# Altium PCB PCB1.PcbDoc
Units mil, origin at the board's own origin, x right, y up, seen from the top; angles counter-clockwise.
Board outline 3000 x 3000 mil, 2 copper layers (Top Layer, Bottom Layer); 48 components, 19 nets, 128 pads, 181 vias.
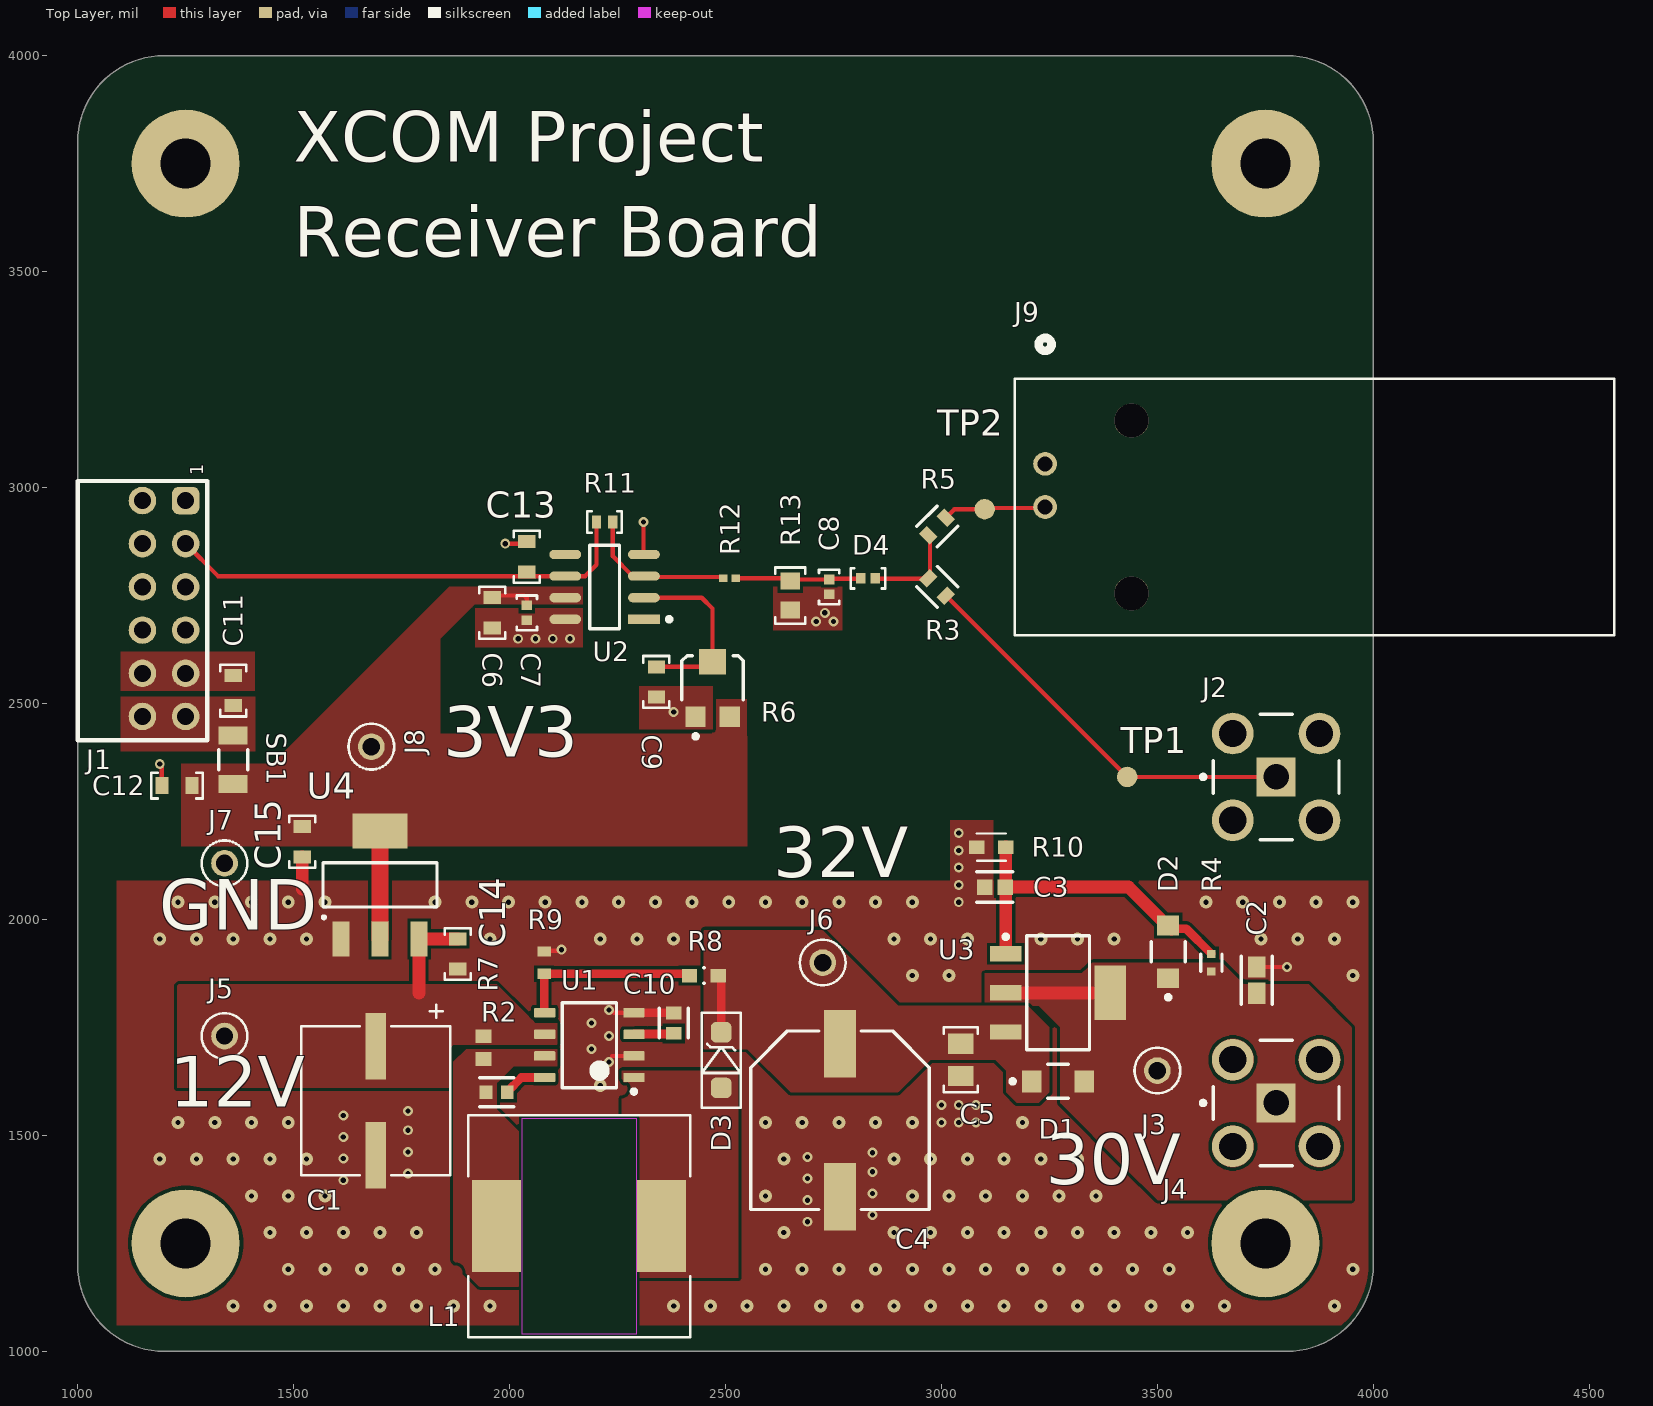
[diagram p0: Top Layer view]
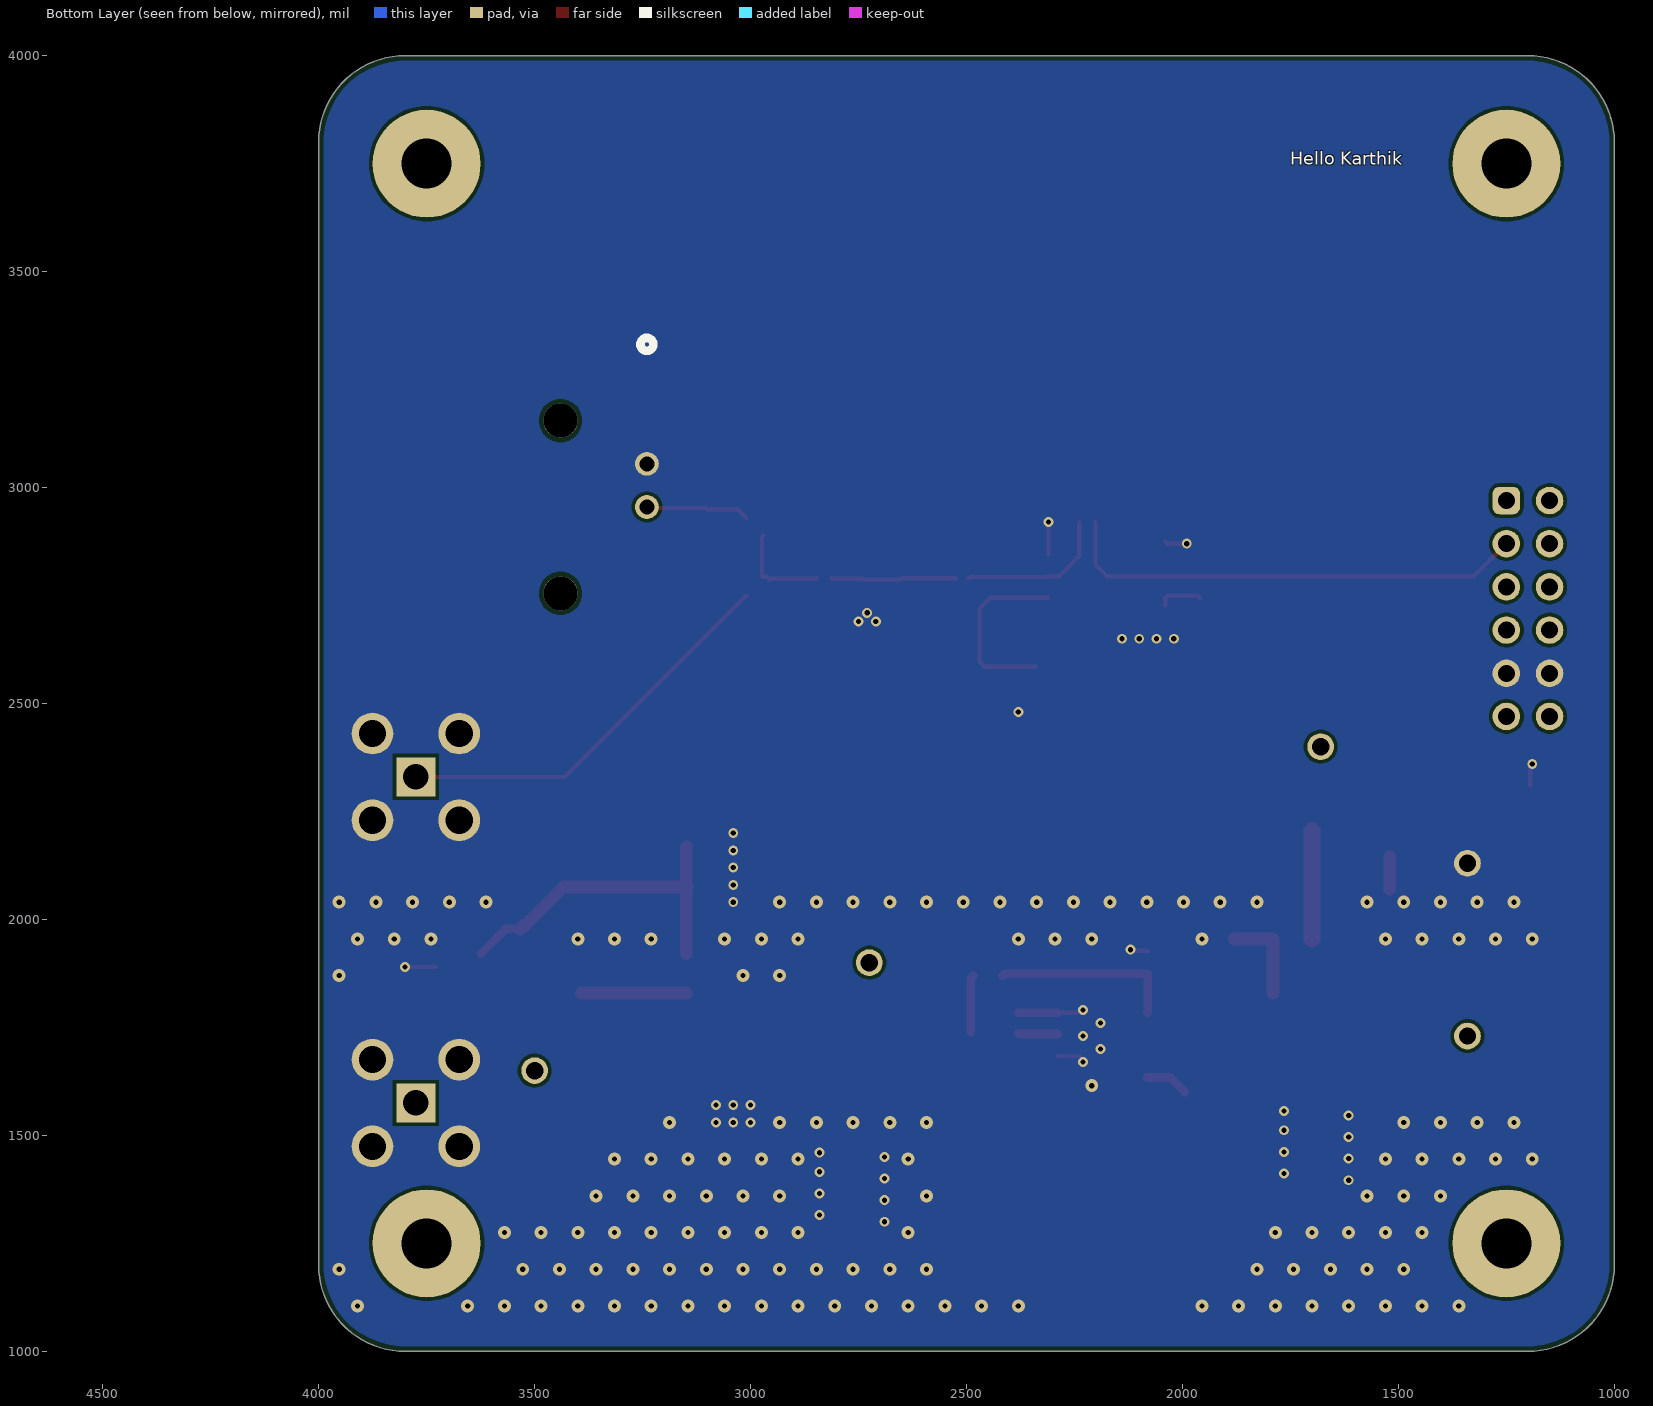
[diagram p1: Bottom Layer view, seen from below]
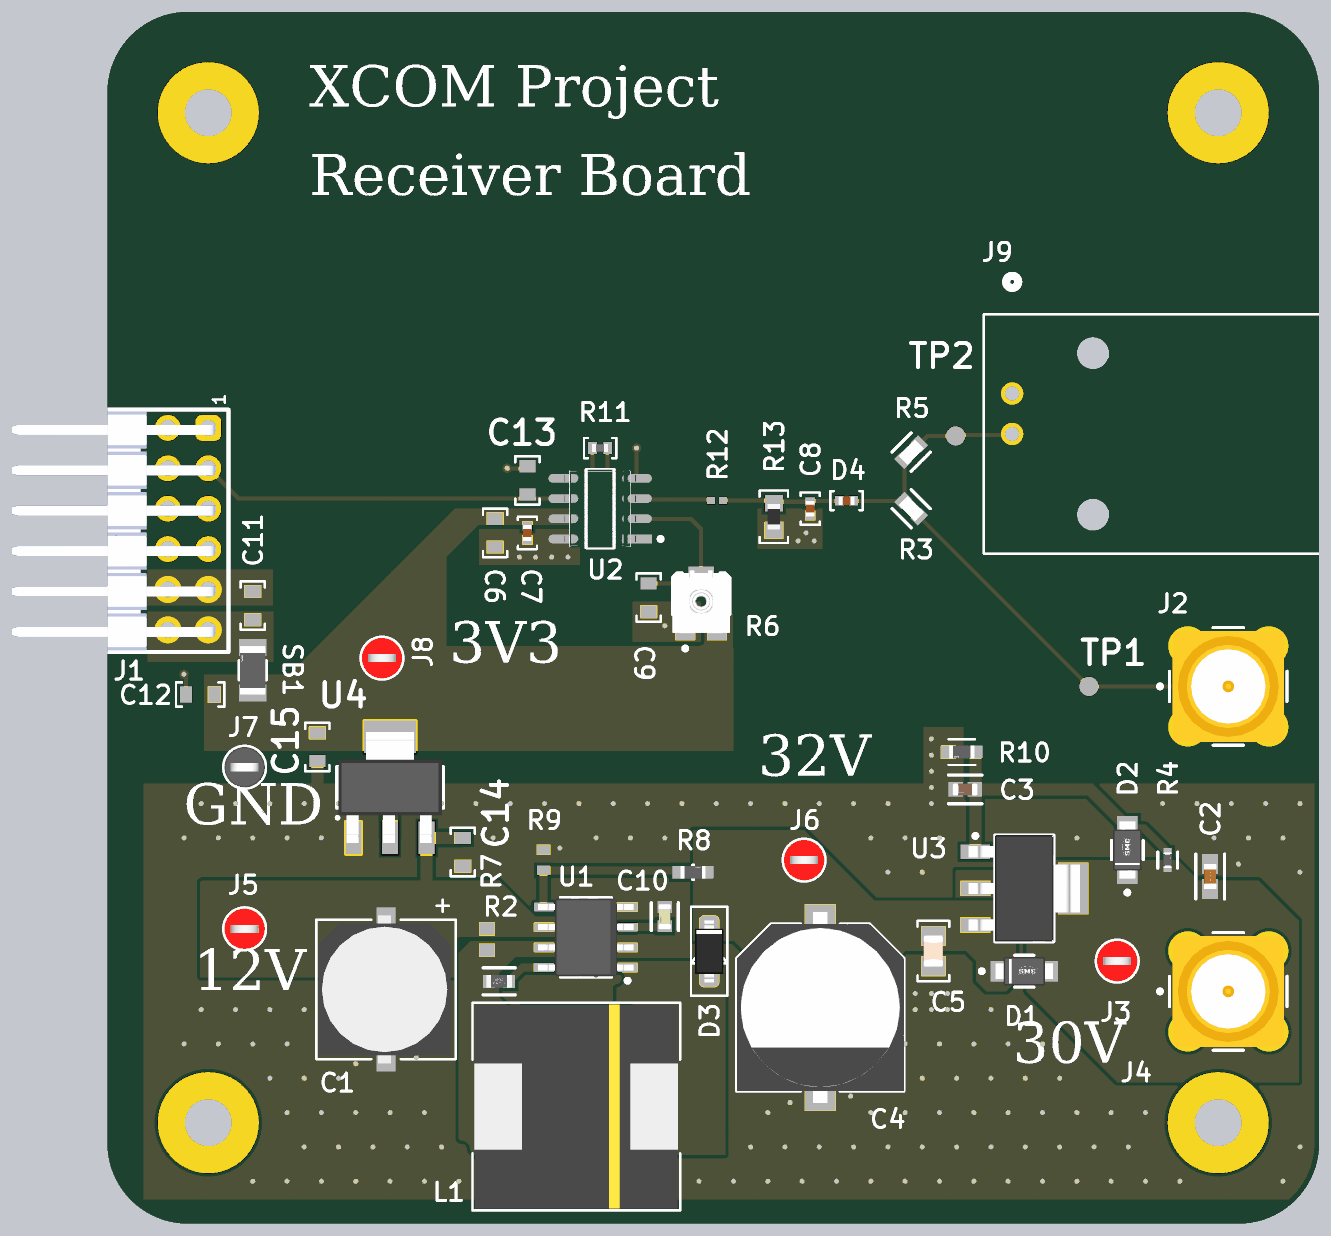
[diagram p2: 3D render of the assembled board from above, using the file's embedded part models]

## Layer stack, top to bottom
Top Solder: solder mask 0.4, Solder Resist, Dk 3.5
Top Layer: signal copper 1.4
Dielectric 1: dielectric 12.6, FR-4, Dk 4.8
Bottom Layer: signal copper 1.4
Bottom Solder: solder mask 0.4, Solder Resist, Dk 3.5

## Board outline
1000,1200 ccw(c1200,1200) 1200,1000 3800,1000 ccw(c3800,1200) 4000,1200 4000,3800 ccw(c3800,3800) 3800,4000 1200,4000 ccw(c1200,3800) 1000,3800 1000,2700

## Design rules (kind name [scope] priority, off if disabled: settings)
AcuteAngle [All] p1: minimum=8.00000000000000E+0001 checktracksonly=FALSE
BoardOutlineClearance "BoardOutlineClearance JLCPCB" [All] p1: gap=11.81 ignorepadtopadclearanceinfootprint=FALSE
Clearance "Clearance JLCPCB 4 layer" [All] p1: gap=7.87 ignorepadtopadclearanceinfootprint=FALSE except(3.54: Arc-Arc Arc-Track Track-Track; 5: Arc-SMDPad Arc-Via Track-SMDPad Track-Via SMDPad-SMDPad; 9.45: THPad-THPad THPad-Via Via-Via; 10: Arc-Hole Track-Hole SMDPad-Hole THPad-Hole Via-Hole Fill-Hole Poly-Hole Region-Hole Text-Hole)
DiffPairsRouting "Diff Pairs USB 2.0" [InDifferentialPairClass('USB 2.0')] p1: maxlimit=5 minlimit=5 mostfreqgap=5 toplayer_minwidth=7.87 toplayer_maxwidth=7.87 toplayer_prefwidth=7.87 bottomlayer_minwidth=7.87 bottomlayer_maxwidth=7.87 bottomlayer_prefwidth=7.87 impedanceprofiledriven=TRUE impedanceprofileid={9C1C01C3-81FD-4AE1-9E3D-BC841176F5CA} maxuncoupledlength=500
DiffPairsRouting "Diff Pairs PCIe Gen 2" [InDifferentialPairClass('PCIe Gen 2')] p2: maxlimit=5 minlimit=5 mostfreqgap=5 toplayer_minwidth=5.53 toplayer_maxwidth=5.53 toplayer_prefwidth=5.53 bottomlayer_minwidth=5.53 bottomlayer_maxwidth=5.53 bottomlayer_prefwidth=5.53 impedanceprofiledriven=TRUE impedanceprofileid={D86E5A41-F98B-413D-93FD-A6E48D035561} maxuncoupledlength=500
HoleSize "HoleSize JLCPCB Pad" [IsPad] p1: absolutevalues=TRUE maxlimit=248.03 minlimit=19.68 maxpercent=80.000 minpercent=20.000
HoleSize "HoleSize JLCPCB 4 layer Cheap" [All] p2: absolutevalues=TRUE maxlimit=248.03 minlimit=11.81 maxpercent=80.000 minpercent=20.000
HoleToHoleClearance "HoleToHoleClearance JLCPCB Same Net" [All] p1: gap=10 allowstackedmicrovias=TRUE
MinimumAnnularRing "MinimumAnnularRing JLCPCB Via" [All] p1: minimumring=2.95
MinimumAnnularRing "MinimumAnnularRing JLCPCB Pad" [IsPad] p2: minimumring=9.84
MinimumAnnularRing "MinimumAnnularRing JLCPCB 1oz" [All] p3: minimumring=5.12
MinimumSolderMaskSliver "MinimumSolderMaskSliver JLCPCB" [All] p1: minsoldermaskwidth=3.94
PlaneClearance [All] p1: clearance=11.81
PlaneConnect [All] p1: planeconnectstyle=Direct reliefexpansion=20 reliefentries=4 reliefconductorwidth=10 reliefairgap=10
PolygonConnect [All] p1: connectstyle=Direct reliefconductorwidth=15 reliefentries=4 polygonreliefangle="45 Angle" airgapwidth=10
RoutingVias "RoutingVias JLCPCB 4 layer" [All] p1: holewidth=19.68 width=39.37 viastyle="Through Hole" minholewidth=11.81 minwidth=17.72 maxholewidth=50 maxwidth=80 useviatemplates=TRUE viatemplateguid#1={1FF1CE2E-D4DA-45DD-BA18-462DD51CCE8B} viatemplateguid#2={A26B80D9-3972-439C-BF20-AF114F6C39ED} viatemplateguid#3={94EF3918-7136-44E3-8D4D-2DFBB820EAE1} viatemplatename#1=v50h30m0mx0(Tol13-8) viatemplatename#2=v65h40m0mx0(Tol13-8) viatemplatename#3=v80h50m0mx0(Tol13-8)
SilkToSilkClearance [All] p1: silktosilkclearance=3
SilkToSolderMaskClearance "SilkToSolderMaskClearance JLCPCB" [IsPad] p1: minsilkscreentomaskgap=5.91 clearancetoexposedcopper=TRUE
SolderMaskExpansion "SolderMaskExpansion JLCPCB" [All] p1: expansion=1.5 istentingtop=FALSE
SupplyNets "Schematic Supply Nets_2" [InNet('12V')] p1: voltage=0.000
SupplyNets "Schematic Supply Nets_1" [InNet('3V3')] p2: voltage=0.000
SupplyNets "Schematic Supply Nets" [InNet('GND')] p3: voltage=0.000
UnRoutedNet [All] p1: checkbadconnections=TRUE
Width "Width JLCPCB 4 layer" [All] p1: maxlimit=196.85 minlimit=3.54 preferedwidth=9.84 minimp=50.000000 maximp=50.000000 favimp=50.000000
21 further rules are at their usual default settings.

## Components (designator, comment, footprint, x,y, rotation, side; value= is the part's Value field where it differs from the comment)
C1 "100uF electrolytic 35 V" PCAP_8x5.4-ELECT_NCA 1690,1580 r270 top value=100uF
C2 "UMK107BJ105KA-T" FP-0603-L_1_6_0_1-W_0_8_0-IPC_A 3730,1859.4 r270 top
C3 "GRM188R6YA106MA73D" FP-GRM188-0_2-IPC_C 3123.64,2075 r180 top
C4 "EEE-FK1V331P" PNSC-EEE-FK1V331P_L 2765,1535 r270 top
C5 "100nF Ceramic 50V" CAPACITOR_0805 3045,1675 r270 top value=0.1uF
C6 "100nF Ceramic 25V" CAPACITOR_0603 1960,2710 r270 top value=0.1uF
C7 "2.2uF Ceramic 35V" CAPACITOR_0402 2040,2710 r270 top value=2.2uF
C8 "15pF Ceramic 50V" CAPACITOR_0402 2740,2770 r270 top value=15pF
C9 "100nF Ceramic 25V" CAPACITOR_0603 2340,2550 r270 top value=0.1uF
C10 "C0603C152F1GACTU" FP-C0603C-CF-MFG 2380,1760 r90 top value="1,500 pF"
C11 "10uF Ceramic 6.3V" CAPACITOR_0603 1360,2530 r90 top
C12 "10uF Ceramic 6.3V" CAPACITOR_0603 1230,2310 r180 top
C13 "18pF Ceramic 50V" CAPACITOR_0603 2040,2840 r90 top value=18pF
C14 "10uF Ceramic 6.3V" CAPACITOR_0603 1880,1920 r270 top
C15 "10uF Ceramic 6.3V" CAPACITOR_0603 1520,2180 r270 top
D1 "1N4007FL" FP-1N4007FL-MFG 3270,1625 r0 top
D2 "1N4007FL" FP-1N4007FL-MFG 3525,1925 r90 top
D3 "STPS140Z" SOD-123 2490,1674.37 r90 top
D4 "BAR9002ELE6327XTMA1" DIODE_0402 2830,2790 r180 top
J1 "PH2RA-12-UA" PH2RA-12-UA-Footprint-1 1250,2970 r90 top
J2 "RF2-04A-T-00-50-G" FP-RF2-04A-T-00-50-G-MFG 3775,2330 r0 top
J3 "5000" FP-5000-MFG 3500,1650 r0 top
J4 "RF2-04A-T-00-50-G" FP-RF2-04A-T-00-50-G-MFG 3775,1575 r0 top
J5 "5000" FP-5000-MFG 1340,1730 r0 top
J6 "5000" FP-5000-MFG 2725,1900 r0 top
J7 "5001" FP-5001-MFG 1340,2130 r0 top
J8 "5000" FP-5000-MFG 1680,2400 r0 top
J9 "031-5431-10RFX" 031-5431-10RFX-Footprint-1 3240,3055 r270 top
L1 "SRR1280-181K" SRR1280 2161,1290 r180 top value="180 uH"
R2 "CRGCQ0603F180R" FP-CRGCQ0603-IPC_C 1970,1600 r0 top value=180Ω
R3 "RMCF0603ZT0R00" FP-RMCF0603-MFG 2990,2770 r315 top value=0mΩ
R4 "ERA-2AEB113X" FP-ERA2A-MFG 3625,1900 r270 top
R5 "RMCF0603ZT0R00" FP-RMCF0603-MFG 2990,2910 r225 top value=0mΩ
R6 "TC33X-2-103E" BOUR-TC33X-2_V 2470,2540 r90 top
R7 "ERJ-3RQFR22V" RESC1608X55X30NL15T15 1940,1703.43 r270 top value=.22
R8 "RC0603FR-0747KL" FP-RC0603FR-0747KL-MFG 2450,1870 r0 top
R9 "RC0603FR-072K2L" RESC1608X55X25LL10T15 2080,1900 r270 top
R10 "RT0603BRC07500RL" RESC16080X45_RT0603-0_55_MFG 3115.47,2167.44 r180 top
R11 "10k Ohm 1% 1/16W" RESISTOR_0402 2220,2920 r0 top
R12 "RC0402FR-0749R9L" RESC1005X40X25LL05T10 2509.53,2790 r180 top value=49.9
R13 "1k Ohm 5% 1/8W" RESISTOR_0603 2650,2750 r270 top
SB1 "JUMPER_0_1206" RESISTOR_1206 1360,2370 r90 top value=0
TP1 "PCB Test Point" TESTPOINT_1.2MM#1 3430,2330 r90 top
TP2 "PCB Test Point" TESTPOINT_1.2MM#2 3130,3050 r90 top
U1 "MC33063AQDRQ1" D0008A_L 2184.65,1709 r180 top
U2 "TLV3501AID" FP-D0008A-IPC_C 2220,2770 r180 top
U3 "LM317MSTT3G" SOT223-3 3270,1830 r0 top
U4 "LM1117IMPX-3.3/NOPB" SOT-223-4 1700,2080 r90 top

## Footprints (in the part's own frame and the unit in brackets; to place one, negate y for a bottom-side part, rotate by r counter-clockwise, add the part's x,y. Pads: shape width x height; smd on the part's side, far side on the other; paste and mask are expansions set on the pad)
031-5431-10RFX-Footprint-1 [mil]
  round 55 / inner round 60 / far side round 55 hole 35 paste-99999 mask+0: 1(0,0) 2(100,0)
  round 79 / inner round 60 / far side round 79 hole 79 unplated paste-99999 mask+0: 3(-100,200) 4(300,200)
  silkscreen extent -291,-70 396,1318
BOUR-TC33X-2_V [mm] "SMD, 3-Leads, Body 3.8x3.6mm"
  rect 1.2x1.2 smd: 1(-1.8,1) 3(-1.8,-1)
  rect 1.5x1.6 smd: 2(1.45,0)
  silkscreen extent -3.07,-1.8 1.8,1.8, body extent -2,-1.8 1.96,1.8, height 1.15
CAPACITOR_0402 [mm]
  rect 0.56x0.6 smd: 1(-0.435,0) 2(0.435,0)
  silkscreen extent -1.02,-0.6 1.02,0.6, body extent -0.5,-0.28 0.5,0.27, height 0.51
CAPACITOR_0603 [mil] "CAPACITOR 0603"
  rect 30x40 smd: 1(-35,0) 2(35,0)
  silkscreen extent -60,-30 60,30, body extent -31,-16 32,16, height 31
CAPACITOR_0805 [mm] "CAPACITOR 0805"
  rect 1.2x1.5 smd: 1(-0.95,0) 2(0.95,0)
  silkscreen extent -1.91,-1 1.9,1, body extent -1,-0.62 1,0.63, height 1.26
D0008A_L [mm] "SOIC, 8-Leads, Body 5x4mm, Pitch 1.27mm, IPC High Density"
  rrect18% 1.25x0.55 smd: 1(-2.625,1.905) 2(-2.625,0.635) 3(-2.625,-0.635) 4(-2.625,-1.905) 5(2.625,-1.905) 6(2.625,-0.635) 7(2.625,0.635) 8(2.625,1.905)
  silkscreen extent -2.75,-2.5 1.6,2.85, body extent -3,-2.45 3,2.45, height 1.63
DIODE_0402 [mm]
  rect 0.56x0.6 smd: 1(-0.435,0) 2(0.435,0)
  silkscreen extent -1.02,-0.6 1.02,0.6, body extent -0.5,-0.28 0.5,0.27, height 0.51
FP-1N4007FL-MFG [mm]
  rect 1.15x1.3 smd paste+0 mask+0: 1(-1.55,0) 2(1.55,0)
  silkscreen extent -2.8,-1 0.6,1, body extent -2.22,-1.1 2.22,1.1, height 0.25
FP-0603-L_1_6_0_1-W_0_8_0-IPC_A [mil]
  rect 49.52x39.85 smd paste+0 mask+0: 1(-30.6,0) 2(30.6,0)
  silkscreen extent -55,-36 55,36, body extent -75,-40 75,40, height 10
FP-5000-MFG [mm]
  round 1.57 hole 1.02 paste-2539.97 mask+0: 1(0,0)
  silkscreen extent -1.35,-1.34 1.35,1.34, body extent -1.45,-1.45 1.45,1.45, height 0.25
FP-5001-MFG [mm]
  round 1.57 hole 1.016 paste-2539.97 mask+0: 1(0,0)
  silkscreen extent -1.35,-1.34 1.35,1.34, body extent -1.45,-1.45 1.45,1.45, height 0.25
FP-C0603C-CF-MFG [mm]
  rect 0.75x0.9 smd paste+0 mask+0: 1(-0.6,0) 2(0.6,0)
  silkscreen extent -0.87,-0.85 0.88,0.85, body extent -1.2,-0.6 1.2,0.6, height 0.25
FP-CRGCQ0603-IPC_C [mil]
  rect 29.85x31.97 smd paste+0 mask+0: 1(-24.68,0) 2(24.68,0)
  silkscreen extent -40,-33 40,33, body extent -44,-22 44,22, height 10
FP-D0008A-IPC_C [mil]
  rect 73.59x21.34 smd paste+0 mask+0: 1(-91.09,75)
  rrect100% 73.59x21.34 smd paste+0 mask+0: 2(-91.09,25) 3(-91.09,-25) 4(-91.09,-75) 5(91.09,-75) 6(91.09,-25) 7(91.09,25) 8(91.09,75)
  silkscreen extent -154,-97 35,97, body extent -132,-100 132,100, height 10
FP-ERA2A-MFG [mm]
  rect 0.475x0.5 smd paste+0 mask+0: 1(-0.512,0) 2(0.512,0)
  silkscreen extent -0.5,-0.63 0.5,0.63, body extent -0.85,-0.4 0.85,0.4, height 0.25
FP-GRM188-0_2-IPC_C [mil]
  rect 35.63x35.68 smd paste+0 mask+0: 1(-23.64,0) 2(23.64,0)
  silkscreen extent -41,-35 41,35, body extent -45,-24 45,24, height 10
FP-RC0603FR-0747KL-MFG [mm]
  rect 0.9x0.8 smd paste+0 mask+0: 1(-0.85,0) 2(0.85,0)
  silkscreen extent -0.03,-0.45 0.03,0.45, body extent -1.4,-0.55 1.4,0.55, height 0.25
FP-RF2-04A-T-00-50-G-MFG [mm]
  rect 2.3x2.3 hole 1.5 paste-2539.97 mask+0: 1(0,0)
  round 2.45 hole 1.6 paste-2539.97 mask+0: 2(-2.55,2.55) 3(2.55,2.55) 4(-2.55,-2.55) 5(2.55,-2.55)
  silkscreen extent -4.42,-3.7 3.7,3.7, body extent -3.88,-3.88 3.88,3.88, height 0.25
FP-RMCF0603-MFG [mm]
  rect 0.65x0.9 smd paste+0 mask+0: 1(-0.725,0) 2(0.725,0)
  silkscreen extent -0.85,-0.85 0.85,0.85, body extent -1.15,-0.58 1.15,0.58, height 0.25
PCAP_8x5.4-ELECT_NCA [mil]
  rect 154x47 smd paste+0 mask+0: 1(-126,0) 2(126,0)
  silkscreen extent -222,-173 173,173, body extent -183,-167 183,160, height 219
PH2RA-12-UA-Footprint-1 [mm]
  rrect50% 1.62x1.62 hole 1: 1(0,0)
  round 1.62 hole 1: 2(0,2.54) 3(-2.54,0) 4(-2.54,2.54) 5(-5.08,0) 6(-5.08,2.54) 7(-7.62,0) 8(-7.62,2.54) 9(-10.16,0) 10(-10.16,2.54) 11(-12.7,0) 12(-12.7,2.54)
  silkscreen extent -14.1,-1.27 1.14,6.35, body extent -14.1,-0.41 1.14,12.35, height 5.04
PNSC-EEE-FK1V331P_L [mm] "CAPAE, 2-Leads, Body 10.5x10.5mm, IPC High Density"
  rect 3.95x1.9 smd: 1(-4.5,0) 2(4.5,0)
  silkscreen extent -5.25,-5.25 5.25,5.25, body extent -6,-5.25 6,5.25, height 10.5
RESC1005X40X25LL05T10 [mm] "Chip Resistor, 2-Leads, Body 1.00x0.50mm, IPC High Density"
  rect 0.5x0.45 smd: 1(-0.375,0) 2(0.375,0)
  body extent -0.53,-0.27 0.53,0.28, height 0.4
RESC1608X55X25LL10T15 [mm] "Chip Resistor, 2-Leads, Body 1.60x0.80mm, IPC High Density"
  rect 0.6x0.8 smd: 1(-0.65,0) 2(0.65,0)
  body extent -0.85,-0.45 0.85,0.45, height 0.55
RESC1608X55X30NL15T15 [mm] "Chip Resistor, 2-Leads, Body 1.60x0.80mm, IPC Medium Density"
  rect 0.8x0.95 smd: 1(-0.675,0) 2(0.675,0)
  body extent -0.87,-0.48 0.87,0.48, height 0.55
RESC16080X45_RT0603-0_55_MFG [mm]
  rect 0.9x0.8 smd: 1(-0.85,0) 2(0.85,0)
  silkscreen extent -0.85,-0.81 0.86,0.8, body extent -1.4,-0.55 1.4,0.55, height 0.25
RESISTOR_0402 [mm] "Resistor 0402"
  rect 0.55x0.75 smd: 1(-0.475,0) 2(0.475,0)
  silkscreen extent -1.02,-0.64 1.02,0.64, body extent -0.5,-0.25 0.5,0.25, height 0.25
RESISTOR_0603 [mil] "Resistor 0603"
  rect 40x45 smd: 1(-33.5,0) 2(33.5,0)
  silkscreen extent -65,-35 65,35, body extent -31,-16 32,16, height 16
RESISTOR_1206 [mil]
  rect 41.66x67.41 smd paste+0 mask+0: 1(-56.18,0) 2(56.18,0)
  silkscreen extent -24,-34 24,34, body extent -87,-44 87,44, height 10
SOD-123 [mm] "Schottky Diode SOD-123"
  rrect50% 1.2x1.22 smd: 1(-1.635,0) 2(1.635,0)
  silkscreen extent -2.79,-1.14 2.79,1.14, body extent -1.95,-0.9 1.95,0.9, height 1.18
SOT223-3 [mm] "SOT223, 4-Leads, Body 6.50x7.00mm (avg), Pitch 2.30mm, IPC Medium Density"
  rect 1.85x0.9 smd: 1(-3.075,2.3) 2(-3.075,0) 3(-3.075,-2.3)
  rect 1.85x3.2 smd: 2(3.075,0)
  silkscreen extent -3.2,-3.35 1.85,3.42, body extent -3.5,-3.35 3.5,3.35, height 1.8
SOT-223-4 [mm]
  rect 2.05x1 smd paste+0 mask+0.102: 1(-3.175,2.3) 2(-3.175,0) 3(-3.175,-2.3)
  rect 2.05x3.25 smd paste+0 mask+0.102: 4(3.175,0)
  silkscreen extent -1.96,-3.35 1.3,3.35, body extent -3.5,-3.25 3.5,3.25, height 1.68
SRR1280 [mil]
  rect 114x213 smd paste+0 mask+0: 1(-191,0) 2(191,0)
  Top Layer keep-out region: -132,-250 -132,250 132,250 132,-250
  silkscreen extent -257,-257 257,257, body extent -252,-252 252,252, height 315
TESTPOINT_1.2MM#1 [mm]
  round 1.2 smd: TP(0,0)
TESTPOINT_1.2MM#2 [mm]
  round 1.2 smd: TP(-2.54,0.762)

## Part data
C1: library part "CAP ALUM 100UF 20% 35V SMD", "100 µF 35 V Aluminum Electrolytic Capacitors Radial, Can - SMD 1000 Hrs", Manufacturer_Part_Number=UCB1V0R1MCL1GS, Mfr_Name=Nichicon, Supplier Part Number 1=667-EEE-FT1V101AP, Copyright="Copyright (C) 2022 Ultra Librarian. All rights reserved.", Made By="Tyson Nguyen", RefDes=RefDes, Supplier 1=Mouser, Type=DEV
C2: library part CMP-2000-05447-3, "None", Capacitance=1uF, Case Code (Imperial)=0603, Case Code (Metric)=1608, Dielectric=X5R, Max Operating Temperature=85°C, Min Operating Temperature=-55°C, Package Quantity=1, Tolerance=10%, Voltage Rating=50V, Case/Package=0603, Construction=Flat, Contact Plating=Nickel, Depth=0.8mm, Halogen Free="Halogen Free", Height=0.8mm, Length=1.6mm, Mount="Surface Mount", Number of Pins=2, Packaging="Tape and Reel", Radiation Hardening=No, RoHS Compliant=Yes, Series=M, Termination=SMD/SMT, Thickness=0.035inch, Voltage Rating (DC)=50V, Width=0.031inch
C3: library part CMP-06035-045466-1, "Chip Multilayer Ceramic Capacitors for General Purpose, 0603, 10uF, X5R, 15%, 20%, 35V", Capacitance=10uF, Case Code (Imperial)=0603, Case Code (Metric)=1608, Dielectric=X5R, Max Operating Temperature=85°C, Min Operating Temperature=-55°C, Tolerance=20%, Voltage Rating=35V, Case/Package=0603, Length=0.063inch, Mount="Surface Mount", Packaging="Tape and Reel", Thickness=0.039inch, Voltage Rating (DC)=35V, Width=0.031inch
C4: library part CMP-2000-06212-1, "Aluminum Electrolytic Capacitor, 330 uF, 35 V, -55 to 105 degC, 2-Pin CAPAE, RoHS, Tape and Reel", Capacitance=330µF, Case Size/Dimension=Ø10x10.2mm, Lifetime@Temperature=2000Hrs@105°C, Manufacturer=Panasonic, Operating Temp Range=-55to+105°C, Operating Temp-Max=105°C, Package Description="2-Pin Capacitor Aluminum Electrolytic, Body 10.3 x 10.3 mm, Height 10.5 mm", Rated Voltage=35V, Ripple Current=850mA, Datasheet URL=https://datasheet.ciiva.com/29313/443481-da-01-en-smd-elko-vfk-g-330-uf-35v-29313592.pdf, Datasheet Version=07/2008, Impedance=0.08O, Manufacturer URL=http://www.panasonic.com/, Mounting Technology=SurfaceMount, Package Reference=EEE-FK1V331P, Series=FK, Type=Can
C5: library part CAPACITOR_0.1uF_0805, "Cap 100nF 50V +/-10% / Ceramic 0805", Supplier Part Number 1=38AH3645, Tolerance="+/- 10%", Voltage=50V, Made By="Robert Pafford", Supplier 1=Newark
C6 C9: library part CAPACITOR_0.1uF_0603_25V, "Cap 100nF 25V +/-10% / Ceramic 0603", Supplier Part Number 1=1276-1006-1-ND, Tolerance="+/- 10%", Voltage=6.3V, ComponentLink1Description=Datsheet, ComponentLink1URL=https://www.mouser.com/datasheet/2/212/KEM_C1002_X7R_SMD-1102033.pdf, Made By="Flip B", Supplier 1=Digikey
C7: library part CAPACITOR_2.2uF_0402, "Cap 2.2uF 35V +/-10% / Ceramic 0402", Supplier Part Number 1=445-9028-1-ND, Tolerance="+/- 10%", Voltage=35V, Made By="Flip B", Supplier 1=Digi-Key
C8: library part CAPACITOR_0.000015uF_0402, "CAP CER 15PF 50V C0G/NP0 0402", Supplier Part Number 1=82AC9245, Tolerance="+/- 5%", Voltage=50V, Made By="Robert Pafford", Supplier 1=Newark
C10: library part CMP-1035-01965-2, "CAP CER 1500PF 100V NP0 0603", Capacitance="1,500 pF", Manufacturer=KEMET, Package=C0603C-CF, Temperature="-55°C to +125°C", Temperature Characteristic=C0G, Temperature Coefficient=30ppm/°C, Temperature Range High=+125°C, Temperature Range Low=-55°C, Tolerance=0.01, Voltage Rating="100 V", Automotive=Yes, Automotive Grade="Grade 1", Category=Cap, ComponentLink2Description=Datasheet, ComponentLink2URL=https://api.kemet.com/component-edge/download/datasheet/C0603C100J5GACAUTO.pdf, Device Class L1="Passive Components", Device Class L2=Capacitors, Device Class L3="Ceramic Capacitors", Digikey Description="CAP CER 1500PF 100V NP0 0603", Height=0.87mm, Lead Free=Yes, Manufacturer Part Number=C0603C152F1GACTU, Material=Ceramic, Mouser Description="Multilayer Ceramic Capacitors MLCC - SMD/SMT 100volts 1500pF 1% C0G", Octopart=https://octopart.com/c0603c152f1gactu-kemet-19049933, RoHS=TRUE
C11 C12 C14 C15: library part CAPACITOR_10uF_0603, "Cap 10uF 6.3V +/-20% / Ceramic 0603", Supplier Part Number 1=1276-1119-1-ND, Tolerance="+/- 20%", Value (uF)="10 uF", Voltage=6.3V, ComponentLink1Description=Digikey, ComponentLink1URL=https://www.digikey.com/en/products/detail/samsung-electro-mechanics/CL10A106MQ8NNNC/3886777, Made By="Flip B", Supplier 1=Digi-Key
C13: library part CAPACITOR_0.000018uF_0603, "Cap 18pF 50V +/-5% / Ceramic 0603", Supplier Part Number 1=311-1061-1-ND, Tolerance="+/- 5%", Voltage=50V, ComponentLink1Description=Datsheet, ComponentLink1URL=https://www.mouser.com/datasheet/2/212/KEM_C1002_X7R_SMD-1102033.pdf, Made By="Flip B", Supplier 1=Digi-Key
D1 D2: library part CMP-10078-122641204-1, "1N4007FL Diode Gen Purp 1KV 1A SOD123FL", Capacitance=6pF, Forward Current=1A, Max Forward Surge Current (Ifsm)=30A, Max Junction Temperature (Tj)=150°C, Max Repetitive Reverse Voltage (Vrrm)=1kV, Min Operating Temperature=-55°C, Peak Reverse Current=5µA, Height=1.1mm, Max Operating Temperature=150°C, NexarPartId=122641204, Reverse Voltage=1kV
D3: "DIODE SCHOTTKY 40V 1A SOD123", Supplier Part Number 1=497-7546-1-ND, Supplier 1=DigiKey
D4: library part "RF Diode 80V 100mA", "RF Diode PIN - Single 80V 100 mA 250 mW PG-TSLP-2-19", Forward Current=100mA, Package=0402, Voltage - Peak Reverse=80V
J1: library part CMP-002-00071-1, "Conn Unshrouded Header HDR 12 POS 2.54mm Solder RA Top Entry Thru-Hole Bag", Max Operating Temperature=105°C, Min Operating Temperature=-40°C, Pins=12
J2 J4: library part CMP-42753-000002-1, "CONN SMA JACK STR 50 OHM PCB"
J3 J5 J6 J8: library part CMP-002-00074-1, "Cable Wrap, 1/2 Inch, Polyethylene, Natural, 50 Ft, Spirap Series", Mounting Technology="PCB, Through Hole"
J7: library part CMP-002-00076-1, "Test Point, Mini, Thm, Pc, .300 L, .100 Od, Heat Resistant Nylon 46, Black", Mounting Technology="PCB, Through Hole", Pins=1
J9: library part CMP-002-00073-1, "RF BNC Connector, Female, Panel Mount, Board And Panel Mount, Solder Terminal, Jack", Max Operating Temperature=85°C, Min Operating Temperature=-55°C, Voltage Rating=500V, Connector Type=Receptacle, Gender=Male, Mounting Technology="Bulkhead, PCB, Panel, Through Hole"
L1: "FIXED IND 180UH 1.75A 300 MOHM", Supplier Part Number 1=SRR1280-181KCT-ND, R="300 mOhm", Supplier 1=DigiKey
R2: library part CMP-03211-005520-1, "CRGCQ 0603 180R 1%", Ambient Temperature Range High=+70°C, Manufacturer="TE Connectivity", Package=CRGCQ0603, Power Rating=0.1W, Resistance=180Ω, Temperature="-55°C to +155°C", Temperature Coefficient=±100ppm/°C, Temperature Range High=+155°C, Temperature Range Low=-55°C, Tolerance=0.01, Voltage Rating=75V, Category=Res, ComponentLink2Description=Datasheet, ComponentLink2URL=https://www.te.com/commerce/DocumentDelivery/DDEController?Action=showdoc&DocId=Data+Sheet%7F1773204-3%7F1%7Fpdf%7FEnglish%7FENG_DS_1773204-3_1.pdf%7F4-2176339-520, Composition="Thick Film", Device Class L1="Passive Components", Device Class L2=Resistors, Device Class L3="Chip SMD Resistors", Digikey Description="CRGCQ 0603 180R 1%", Height=0.55mm, Ipc Land Pattern Name=RESC16080X45, Lead Free=Yes, Manufacturer Part Number=CRGCQ0603F180R, Octopart=https://octopart.com/crgcq0603f180r-te+connectivity-91018047, RoHS=TRUE, Series=CRGCQ
R3 R5: library part CMP-26527-000011-1, "RES 0 OHM JUMPER 1/10W 0603", Manufacturer=Stackpole, Package=RMCF0603, Power Rating=0.1W, Resistance=0mΩ, Temperature="-55°C to +155°C", Temperature Range High=+155°C, Temperature Range Low=-55°C, Voltage Rating=75V, Automotive=Yes, Automotive Grade="Grade 0", Category=Res, ComponentLink2Description=Datasheet, ComponentLink2URL=https://www.seielect.com/catalog/sei-rmcf_rmcp.pdf, Composition="Thick Film", Device Class L1="Passive Components", Device Class L2=Resistors, Device Class L3="Chip SMD Resistors", Digikey Description="RES 0 OHM JUMPER 1/10W 0603", Height=0.55mm, Ipc Land Pattern Name=RESC15580X45, Lead Free=Yes, Manufacturer Part Number=RMCF0603ZT0R00, Octopart=https://octopart.com/rmcf0603zt0r00-stackpole+electronics-19213618, RoHS=TRUE, Series=RMCF
R4: library part CMP-2002-05776-2, Case Code (Imperial)=0402, Case Code (Metric)=1005, Max Operating Temperature=155°C, Max Power Dissipation=63mW, Min Operating Temperature=-55°C, Resistance=11kΩ, Temperature Coefficient=25ppm/°C, Tolerance=0.1%, Voltage Rating=25V, Case/Package=0402, Composition="Metal Film, Thin Film", Contact Plating=Tin, Depth=500µm, Features="Automotive AEC-Q200", Height=406.4µm, Lead Free="Lead Free", Length=1mm, Lifecycle Status=Production, Military Standard=Not, Mount="Surface Mount", NexarPartId=42798195, Number of Terminations=2, Packaging="Cut Tape", Power Rating=63mW, Radiation Hardening=No, REACH SVHC="No SVHC", RoHS=Compliant, Schedule B="8533210045, 8533210045", Voltage Rating (DC)=25V, Width=500µm
R6: library part CMP-009-00060-2, "Trimming Potentiometer, 10000 Ohm, -40 to 100 degC, 3-Pin SMD, RoHS, Tape and Reel", Case/Package=TC33X-2, Manufacturer=Bourns, Max Operating Temperature=120°C, Min Operating Temperature=-40°C, Package Description="3-Pin Surface Mount Device, Body 3.8 x 3.6 mm", Package Quantity=2500, Power=100mW, Resistance=10k, Tolerance=25%, Composition=Potentiometer, Datasheet URL=http://www.bourns.com/docs/Product-Datasheets/TC33.pdf, Datasheet Version=Aug-16, Manufacturer URL=http://www.bourns.com/, Mounting Technology=SM, Package Reference=TC33X-2, Packaging=TapeandReel, RoHS Compliant=True
R7: library part CMP-2000-00853-1, Manufacturer=Panasonic, Part Number=ERJ-3RQFR22V
R8: library part CMP-1659-00055-2, "RES SMD 47K OHM 1% 1/10W 0603", Case Code (Imperial)=0603, Case Code (Metric)=1608, Max Operating Temperature=155°C, Max Power Dissipation=100mW, Min Operating Temperature=-55°C, Package Quantity=1, Resistance=47kR, Resistance Tolerance=1%, Resistor Type="Thick Film", Temperature Coefficient=100ppm/°C, Voltage Rating=50V, Case/Package=0603, Construction=Rectangular, Depth=0.8mm, Features="Moisture Resistant", Height=0.022inch, Lead Free="Lead Free", Length=0.063inch, Military Standard=Not, Number of Pins=2, Number of Terminations=2, Packaging="Tape and Reel", Power Rating=100mW, RoHS Compliant=Yes, Series=RC, Size Code=0603, Technology="THICK FILM", Termination=SMD/SMT, Tolerance=1%, Voltage Rating (DC)=50V, Width=0.031inch
R9: library part CMP-2000-06934-1, "Thick Film Resistor, 2.2 KOhm, 100 mW, 50 V, +/- 1%, -55 to 155 degC, 2-Pin SMD (0603), RoHS, Tape and Reel", Case Code - in=0603, Case Code - mm=1608, Manufacturer=Yageo, Operating Temperature Range=-55Cto+155C, Package Description="2-Pin Surface Mount Device, Body 1.6 x 0.8 mm", Power Rating=100mW, Resistance=2.2kOhms, Temperature Coefficient=100PPM/C, Tolerance=1%, Voltage Rating=50V, Datasheet URL=http://www.yageo.com/documents/recent/PYu-RC_Group_51_RoHS_L_7.pdf, Datasheet Version="Rev. 7, 05/2017", Manufacturer URL=http://www.yageo.com/, Mounting Technology=SurfaceMount, Package Reference=0603, Packaging=Reel, Product=ThickFilmResistorsGeneralPurpose, Series=RC, Termination Style=SMD/SMT
R10: library part CMP-00621-87214386-1, "Fixed Resistor, Thin Film, 0.1W, 500ohm, 75V, 0.1% +/-Tol, 15ppm/Cel, Surface Mount, 0603", Case/Package=0603, Max Operating Temperature=155°C, Min Operating Temperature=-55°C, Power Rating=100mW, Resistance=500Ω, Temperature Coefficient=15ppm/°C, Tolerance=0.1%, Voltage Rating=75V, ComponentLink1Description="Manufacturer URL", ComponentLink1URL=http://www.yageo.com/, ComponentLink2Description="Datasheet URL", ComponentLink2URL=https://www.yageo.com/upload/media/product/productsearch/datasheet/rchip/PYu-RT_1-to-0.01_RoHS_L_15.pdf, ComponentLink3Description="Package URL", ComponentLink3URL=http://www.yageo.com/exep/pages/download/literatures/PYu-R_Mount_10.pdf, Composition="Thin Film", Height=550µm, Packaging="Tape & Reel", RoHS=Non-Compliant
R11: library part RESISTOR_10K_0402, "RES 10k OHM 1% 1/16W 0402", Digikey Part Numer=CR0603-JW-104ELFTR-ND, Supplier Part Number 1=YAG3436CT-ND, Tolerance="+/- 1%", Value  (Ohms)=10K, Made By="Robert Pafford", Supplier=Digikey, Supplier 1=Digi-Key, Wattage=1/16W
R12: library part CMP-2002-07709-1, Manufacturer="Yageo / Phycomp", Part Number=RC0402FR-0749R9L
R13: library part RESISTOR_1K_0603, "RES 1k OHM 5% 1/8W 0603", Digikey Part Numer=CR0603-JW-104ELFTR-ND, Supplier Part Number 1=2019-RK73B1JTTD102JCT-ND, Tolerance="+/- 5%", Value  (Ohms)=1K, ComponentLink1Description=Datasheet, ComponentLink1URL=https://www.bourns.com/docs/product-datasheets/CRxxxxx.pdf, Made By="Robert Pafford", Supplier=Digikey, Supplier 1=Digi-Key, Wattage=1/8W
SB1: "JUMPER 0OHM 1206"
TP1 TP2: library part TESTPOINT, Made By="Robert Pafford"
U1: library part CMP-0344-00012-2, "Inverting Buck-Boost Regulator with 3 to 40 V Input and 1.25 to 40 V Output, -40 to 125 degC, 8-Pin SOIC (D), Green (RoHS & no Sb/Br)", Manufacturer="Texas Instruments", Switch Current Limit(Typ)(A)=1.5, Switching Frequency(Max)(kHz)=100, Code_JEDEC=MS-012AA, ComponentLink1Description=Datasheet, ComponentLink1URL=http://www.ti.com/general/docs/lit/getliterature.tsp?genericPartNumber=MC33063A-Q1&fileType=pdf, ComponentLink2Description="Package Specification", ComponentLink2URL=http://www.ti.com/litv/pdf/msoi002j, DatasheetVersion=SLLS654B, Eco-Plan="Green (RoHS & no Sb/Br)", Mounting Technology="Surface Mount", PackageDescription="8-Pin Plastic Small Outline Integrated Circuit, 4.9 x 3.9 mm, Pitch 1.27 mm Pitch", PackageReference=D0008A, PackageVersion="revM, Jun-2011", PartNumber=MC33063AQDRQ1, Regulated Outputs(#)=1, SubFamily="Inverting Regulator", Topology="Inverting Buck-Boost", Vin(Max)(V)=40, Vin(Min)(V)=3, Vout(Max)(V)=40, Vout(Min)(V)=1.25
U2: library part CMP-04896-000133-1, "IC COMPARATOR 4.5NS R-R HS 8SOIC", Case/Package=SOIC, Input Bias Current=10pA, Input Offset Voltage (Vos)=6.5mV, Max Operating Temperature=125°C, Max Supply Voltage=5.5V, Min Operating Temperature=-40°C, Min Supply Voltage=2.7V, Nominal Supply Current=3.2mA, Operating Supply Current=5mA, Output Current=74mA, Package Quantity=75, Power Supply Rejection Ratio (PSRR)=100dB, Common Mode Rejection Ratio=70dB, Height=1.58mm, Hysteresis=6mV, Lead Free="Lead Free", Length=4.9mm, Mount="Surface Mount", Number of Channels=1, Number of Elements=1, Number of Pins=8, Output Type=TTL, Packaging=Rail/Tube, Propagation Delay=10ns, Quiescent Current=5mA, Radiation Hardening=No, REACH SVHC="No SVHC", Response Time=4.5ns, RoHS Compliant=Yes, Supply Type=Single, Type="General Purpose", Weight=0.002677oz, Width=3.91mm
U3: "Linear Voltage Regulator IC Positive Adjustable 1 Output 500mA SOT-223 (TO-261)", Supplier Part Number 1=LM317MSTT3GOSCT-ND, Supplier 1=DigiKey
U4: "800-mA 15-V linear voltage regulator 4-SOT-223 -40 to 125", Package="SOT-223-4 Texas Instruments", Arrow_Electronics-Purchase-URL=https://snapeda.com/shop?store=Arrow+Electronics&id=410186, Availability=Good, DigiKey-Purchase-URL=https://snapeda.com/shop?store=DigiKey&id=410186, MF="Texas Instruments", Mouser-Purchase-URL=https://snapeda.com/shop?store=Mouser&id=410186, MP=LM1117IMPX-3.3/NOPB, Price=None, SnapEDA_Link=https://www.snapeda.com/parts/LM1117IMPX-3.3/NOPB/Texas%20Instruments/view-part/410186/?ref=snap, Texas_Instruments-Purchase-URL=https://snapeda.com/shop?store=Texas+Instruments&id=410186

## Free pads (board coordinates)
  round 250 hole 116: 3(1250,1250) 3(1250,3750) 3(3750,1250) 3(3750,3750)

## Via types
v1: diameter 30, hole 12, Top Layer to Bottom Layer, tented both sides, 136 vias
v2: diameter 23, hole 12, Top Layer to Bottom Layer, tented both sides, 45 vias

## Nets (pads, with @x,y where several pads share a name; then routed paths per layer and width w, separated by ;. In a path a pad name is that pad's centre, name@x,y a point inside that pad or via, vN(x,y) a via of type N, cw(c..) or ccw(c..) an arc to the next point about the centre after c; other vN are vias at no path point)
3V3: C6.1 C7.1 C12.1 C15.1 J8.1 R6.3 SB1.1 U2.7 U4.2 U4.4 | length 351.5
  Top Layer w10: C6.1 1965,2750 2034.14,2750 2040,2744.14 C7.1
  Top Layer w40: U4.2 U4.4
12V: C1.1 C14.1 J5.1 R7.1 U1.6 U4.3 | length 214.7
  Top Layer w30: 1790,1830 1790,1954.45 U4.3 C14.1
GND: C1.2 C2.1 C3.2 C4.2 C5.2 C6.2 C7.2 C8.2 C9.2 C10.2 C11.2 C12.2 C13.2 C14.2 C15.2 J1.9 J1.10 J2.2 J2.3 J2.4 J2.5 J4.2 J4.3 J4.4 J4.5 J7.1 J9.1 R6.1 R9.1 R10.2 R13.2 U1.2 U1.4 U2.4 U2.8 U4.1 | length 555
  Top Layer w10: v2(1190,2360) 1190,2356.48 1195,2351.48 C12.2 ; v2(1990,2870) 2035,2870 C13.2 ; R9.1 2082.2,1927.8 2117.8,1927.8 v2(2120,1930) ; 2238,1683 2239,1684 U1.2 ; 2242,1784 U1.4 U1.4@2288.19,1783.81 ; v2(2310,2920) 2310,2846.09 U2.4 ; C10.2@2379.81,1783.81 C10.2 ; C2.1 v2(3800,1890)
  Top Layer w20: U1.4@2288.19,1783.81 C10.2@2379.81,1783.81
  Top Layer w30: 1520,2070 C15.2
  other v1: 1360,1105 1445,1105 1530,1105 1615,1105 1700,1105 1785,1105 1870,1105 1955,1105 2380,1105 2465,1105 2550,1105 2635,1105 2720,1105 2805,1105 2890,1105 2975,1105 3060,1105 3145,1105 3230,1105 3315,1105 3400,1105 3485,1105 3570,1105 3655,1105 3910,1105 1487.5,1190 1572.5,1190 1657.5,1190 1742.5,1190 1827.5,1190 2592.5,1190 2677.5,1190 2762.5,1190 2847.5,1190 2932.5,1190 3017.5,1190 3102.5,1190 3187.5,1190 3272.5,1190 3357.5,1190 3442.5,1190 3527.5,1190 3952.5,1190 1445,1275 1530,1275 1615,1275 1700,1275 1785,1275 2635,1275 2890,1275 2975,1275 3060,1275 3145,1275 3230,1275 3315,1275 3400,1275 3485,1275 3570,1275 1402.5,1360 1487.5,1360 1572.5,1360 2592.5,1360 2932.5,1360 3017.5,1360 3102.5,1360 3187.5,1360 3272.5,1360 3357.5,1360 1190,1445 1275,1445 1360,1445 1445,1445 1530,1445 2635,1445 2890,1445 2975,1445 3060,1445 3145,1445 3230,1445 3315,1445 1232.5,1530 1317.5,1530 1402.5,1530 1487.5,1530 2592.5,1530 2677.5,1530 2762.5,1530 2847.5,1530 2932.5,1530 3187.5,1530 2210,1615 2932.5,1870 3017.5,1870 3952.5,1870 1190,1955 1275,1955 1360,1955 1445,1955 1530,1955 1955,1955 2210,1955 2295,1955 2380,1955 2890,1955 2975,1955 3060,1955 3230,1955 3315,1955 3400,1955 3740,1955 3825,1955 3910,1955 1232.5,2040 1317.5,2040 1402.5,2040 1487.5,2040 1572.5,2040 1827.5,2040 1912.5,2040 1997.5,2040 2082.5,2040 2167.5,2040 2252.5,2040 2337.5,2040 2422.5,2040 2507.5,2040 2592.5,2040 2677.5,2040 2762.5,2040 2847.5,2040 2932.5,2040 3612.5,2040 3697.5,2040 3782.5,2040 3867.5,2040 3952.5,2040
  other v2: 2690,1300 2840,1315.67 2690,1350 2840,1365.67 1615,1396.17 2690,1400 1765,1411.83 2840,1415.67 1615,1446.17 2690,1450 2840,1460 1765,1461.83 1615,1496.17 1765,1511.83 3000,1530 3040,1530 3080,1530 1615,1546.17 1765,1556.17 3000,1570 3040,1570 3080,1570 2230,1670 2190,1700 2230,1730 2190,1760 2230,1790 3040,2040 3040,2080 3040,2120 3040,2160 3040,2200 2380,2480 2020,2650 2060,2650 2100,2650 2140,2650 2710,2690 2750,2690 2730,2710
GPIO: C13.1 J1.3 R11.1 U2.6 | length 1092
  Top Layer w10: J1.3 1325,2795 U2.6 2175,2795 2201.3,2821.3 R11.1
NetC2_2: C2.2 D1.2 D2.1 J3.1 J4.1 R4.2 U3.2 | length 242.1
  Top Layer w30: U3.2@3148.94,1830 U3.2@3391.06,1830
NetC3_1: C3.1 D2.2 R4.1 R10.1 U3.1 | length 787.7
  Top Layer w20: D2.2@3532.64,1978.39 3566.79,1978.39 R4.1@3624.29,1920.88
  Top Layer w30: C3.1 C3.1@3148.94,2075 ; U3.1 C3.1@3148.94,2075 ; R10.1 C3.1@3148.94,2075 ; D2.2@3532.64,1978.39 D2.2 3522.05,1986.02 3433.07,2075 C3.1@3148.94,2075
NetC4_1: C4.1 C5.1 D1.1 D3.2 J6.1 R8.2 U3.3 | length 134.4
  Top Layer w20: R8.2 2484.25,1870 2490,1864.25 D3.2
NetC8_1: C8.1 D4.2 R12.1 R13.1 | length 291
  Top Layer w10: R12.1 2650.75,2790 2653.63,2787.13 C8.1 2741.44,2788.56 2811.44,2788.56 D4.2
NetC9_1: C9.1 R6.2 U2.2 | length 427.2
  Top Layer w10: U2.2 2445,2745 2470,2720 R6.2 2457.91,2585 C9.1
NetC10_1: C10.1 U1.3 | length 93
  Top Layer w20: U1.3 2288.83,1734.83 2378.45,1734.83 C10.1
NetC11_1: C11.1 J1.11 J1.12 SB1.2
NetD3_1: D3.1 L1.1 U1.1
NetD4_1: D4.1 R3.1 R5.2 | length 228.3
  Top Layer w10: D4.1 2848.13,2789 2953.02,2789 2955.31,2786.7 2962.02,2793.41 2973.3,2793.41 2973.3,2866.7 2973.46,2866.87 2973.46,2875.15 2973.3,2875.31 2973.3,2886.34 R5.2
NetJ2_1: J2.1 R3.2 TP1.TP | length 928.7
  Top Layer w10: R3.2 TP1.TP J2.1@3765,2330
NetJ9_2: J9.2 R5.1 TP2.TP | length 240.1
  Top Layer w10: R5.1 3030,2950 TP2.TP 3102.5,2952.5 3237.5,2952.5 J9.2
NetL1_2: L1.2 R2.1 R7.2 U1.7
NetR2_2: R2.2 U1.8 | length 101.3
  Top Layer w20: R2.2 1994.68,1601.06 2027.62,1634 U1.8
NetR8_1: R8.1 R9.2 U1.5 | length 429.6
  Top Layer w20: U1.5 2080.83,1784 2080,1784.83 R9.2 2412.13,1874.41 R8.1
NetR11_2: R11.2 R12.2 U2.3 | length 356
  Top Layer w10: R11.2 2238.7,2841.26 2284.96,2795 U2.3 2313.26,2792.83 2491.93,2792.83 R12.2
pads on no net: J1.1 J1.2 J1.4 J1.5 J1.6 J1.7 J1.8 J9.3 J9.4 U2.1 U2.5
copper on no net: | length 7.1
  Top Layer w10: 3235,3050 3240,3055

## Polygon pours and split planes (outlines as drawn)
GND on Top Layer "NONET_L-01_P-001" (solid, remove dead copper, pour order 23): 1090,1060 3990,1060 3990,2090 1090,2090
GND on Top Layer "NONET_L-01_P-001" (solid, remove dead copper, pour order 11): 2610,2770 2770,2770 2770,2670 2610,2670
GND on Top Layer "NONET_L-01_P-001" (solid, remove dead copper, pour order 12): 2300,2540 2470,2540 2470,2440 2300,2440
3V3 on Top Layer "NONET_L-01_P-001" (solid, remove dead copper, pour order 13): 2468.74,2510 2548.74,2510 2548.74,2340 2468.74,2340
GND on Top Layer "NONET_L-01_P-001" (solid, remove dead copper, pour order 14): 1920,2720 2170,2720 2170,2630 1920,2630
3V3 on Top Layer "NONET_L-01_P-001" (solid, remove dead copper, pour order 15): 1920,2770 2170,2770 2170,2730 1920,2730
NetC11_1 on Top Layer "NONET_L-01_P-001" (solid, remove dead copper, pour order 19): 1100,2515.24 1411.62,2515.24 1411.62,2390 1100,2390
GND on Top Layer "NONET_L-01_P-001" (solid, remove dead copper, pour order 21): 1100,2530 1410,2530 1410,2620 1100,2620
3V3 on Top Layer "NONET_L-01_P-001" (solid, remove dead copper, pour order 22): 1920,2770 1860,2770 1450,2360 1240,2360 1240,2170 2550,2170 2550,2423.74 2543.74,2430 1840,2430 1840,2650 1920,2730
GND on Top Layer "NONET_L-01_P-001" (solid, remove dead copper, pour order 16): 3020,2230 3120,2230 3120,2010 3020,2010
GND on Top Layer "NONET_L-01_P-001" (solid, remove dead copper, pour order 10): 2980,1670 3100,1670 3100,1500 2980,1500
GND on Top Layer "NONET_L-01_P-001" (solid, remove dead copper, pour order 9): 2660,1500 2860,1500 2860,1260 2660,1260
GND on Top Layer "NONET_L-01_P-001" (solid, remove dead copper, pour order 8): 1590,1580 1800,1580 1800,1370 1590,1370
GND on Top Layer "NONET_L-01_P-001" (solid, remove dead copper, pour order 6): 2150,1810 2150,1660 2320,1660 2320,1810
NetL1_2 on Top Layer "NONET_L-01_P-001" (solid, remove dead copper, pour order 5): 2110,1700 1900,1700 1870,1670 1870,1210 1930,1150 2020,1150 2060,1190 2060,1470 1970,1560 1970,1620 2010,1660 2110,1660
NetC2_2 on Top Layer "NONET_L-01_P-001" (solid, remove dead copper, pour order 3): 3100,1875 3325,1875 3350,1900 3650,1900 3700,1850 3850,1850 3950,1750 3950,1350 3500,1350 3275,1575 3275,1750 3225,1800 3100,1800
NetC4_1 on Top Layer "NONET_L-01_P-001" (solid, remove dead copper, pour order 2): 2450,1975 2450,1700 2550,1700 2650,1600 2900,1600 2975,1675 3125,1675 3150,1650 3150,1600 3175,1575 3225,1575 3250,1600 3250,1750 3200,1800 2900,1800 2725,1975
12V on Top Layer "NONET_L-01_P-001" (solid, remove dead copper, pour order 1): 1230,1610 1860,1610 1860,1700 1870,1710 1980,1710 2110,1710 2110,1760 2060,1760 1970,1850 1230,1850
NetD3_1 on Top Layer "NetD3" (solid, remove dead copper, pour order 0): 2260,1650 2260,1170 2530,1170 2530,1650
GND on Bottom Layer "NONET_L-01_P-001" (solid, remove dead copper, pour order 4): 4000,4000 1000,4000 1000,1000 4000,1000

## Silkscreen, mask and mechanical layers (free items; w line width, h text height)
Top Overlay:
  text "XCOM Project" at 1500,3715.85 h200
  text "Receiver Board" at 1500,3496.51 h200
  text "3V3" at 1846.72,2339.01 h200
  text "32V" at 2611.08,2059.01 h200
  text "GND" at 1188.68,1938.36 h200
  text "12V" at 1212.92,1528.17 h200
  text "30V" at 3241.08,1348.36 h200
Bottom Overlay:
  text "Hello Karthik" at 1750,3736.9 h50

## Text inside footprints (layer, text, board x,y; h text height)
J1: Top Overlay "1" at 1291,3029 h30 r90
J9: Mechanical 13 "RefDes2" at 3215,3042.5 h50 r270